# Altium PCB PCB_GW-ERP2U700_2021-09-18.pcbdoc
Units mm, origin at the board's own origin, x right, y up, seen from the top; angles counter-clockwise.
Board outline 149.35 x 127.63 mm, 2 copper layers (Top Layer, Bottom Layer); 26 components, 14 nets, 126 pads, 166 vias.
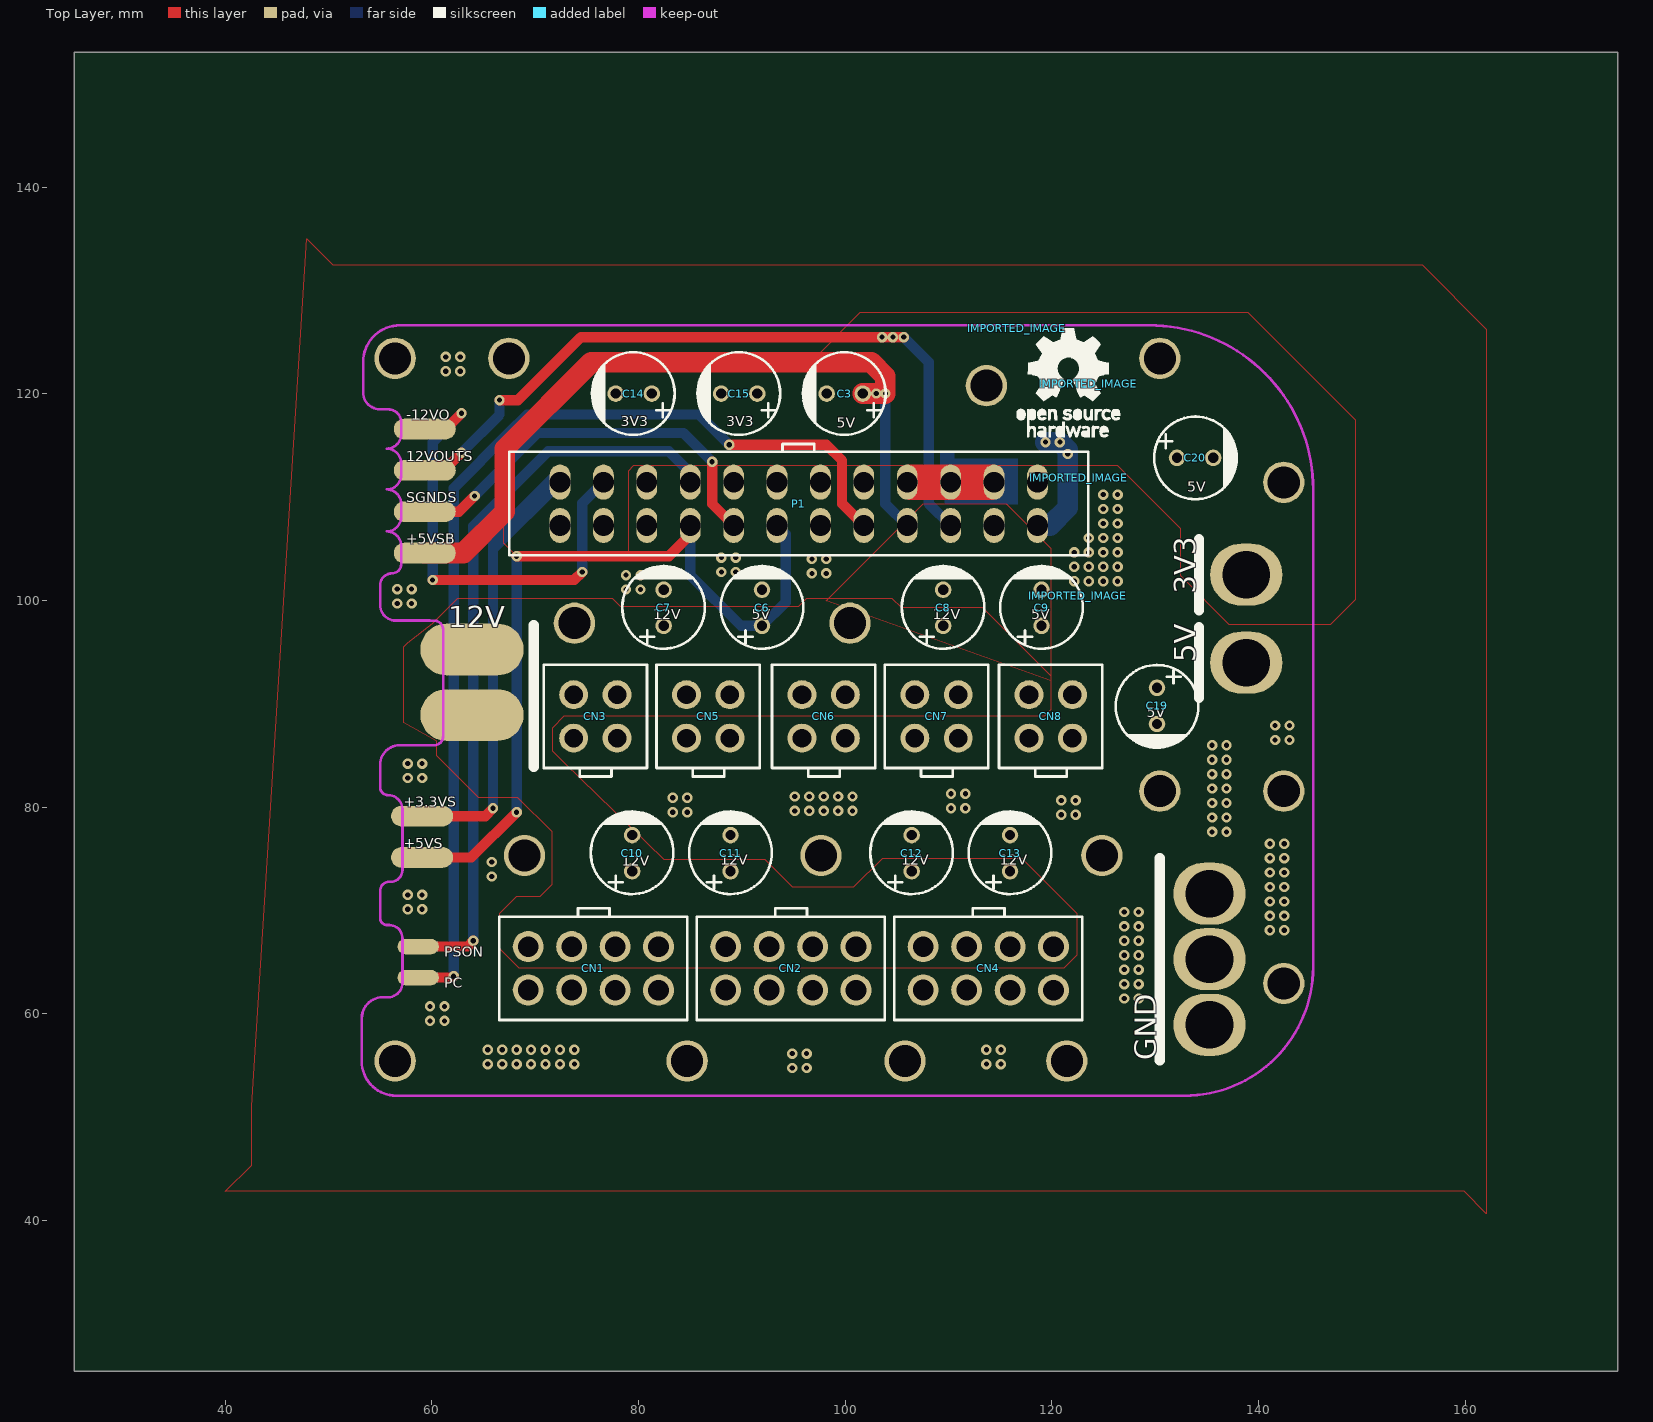
[diagram p0: Top Layer view]
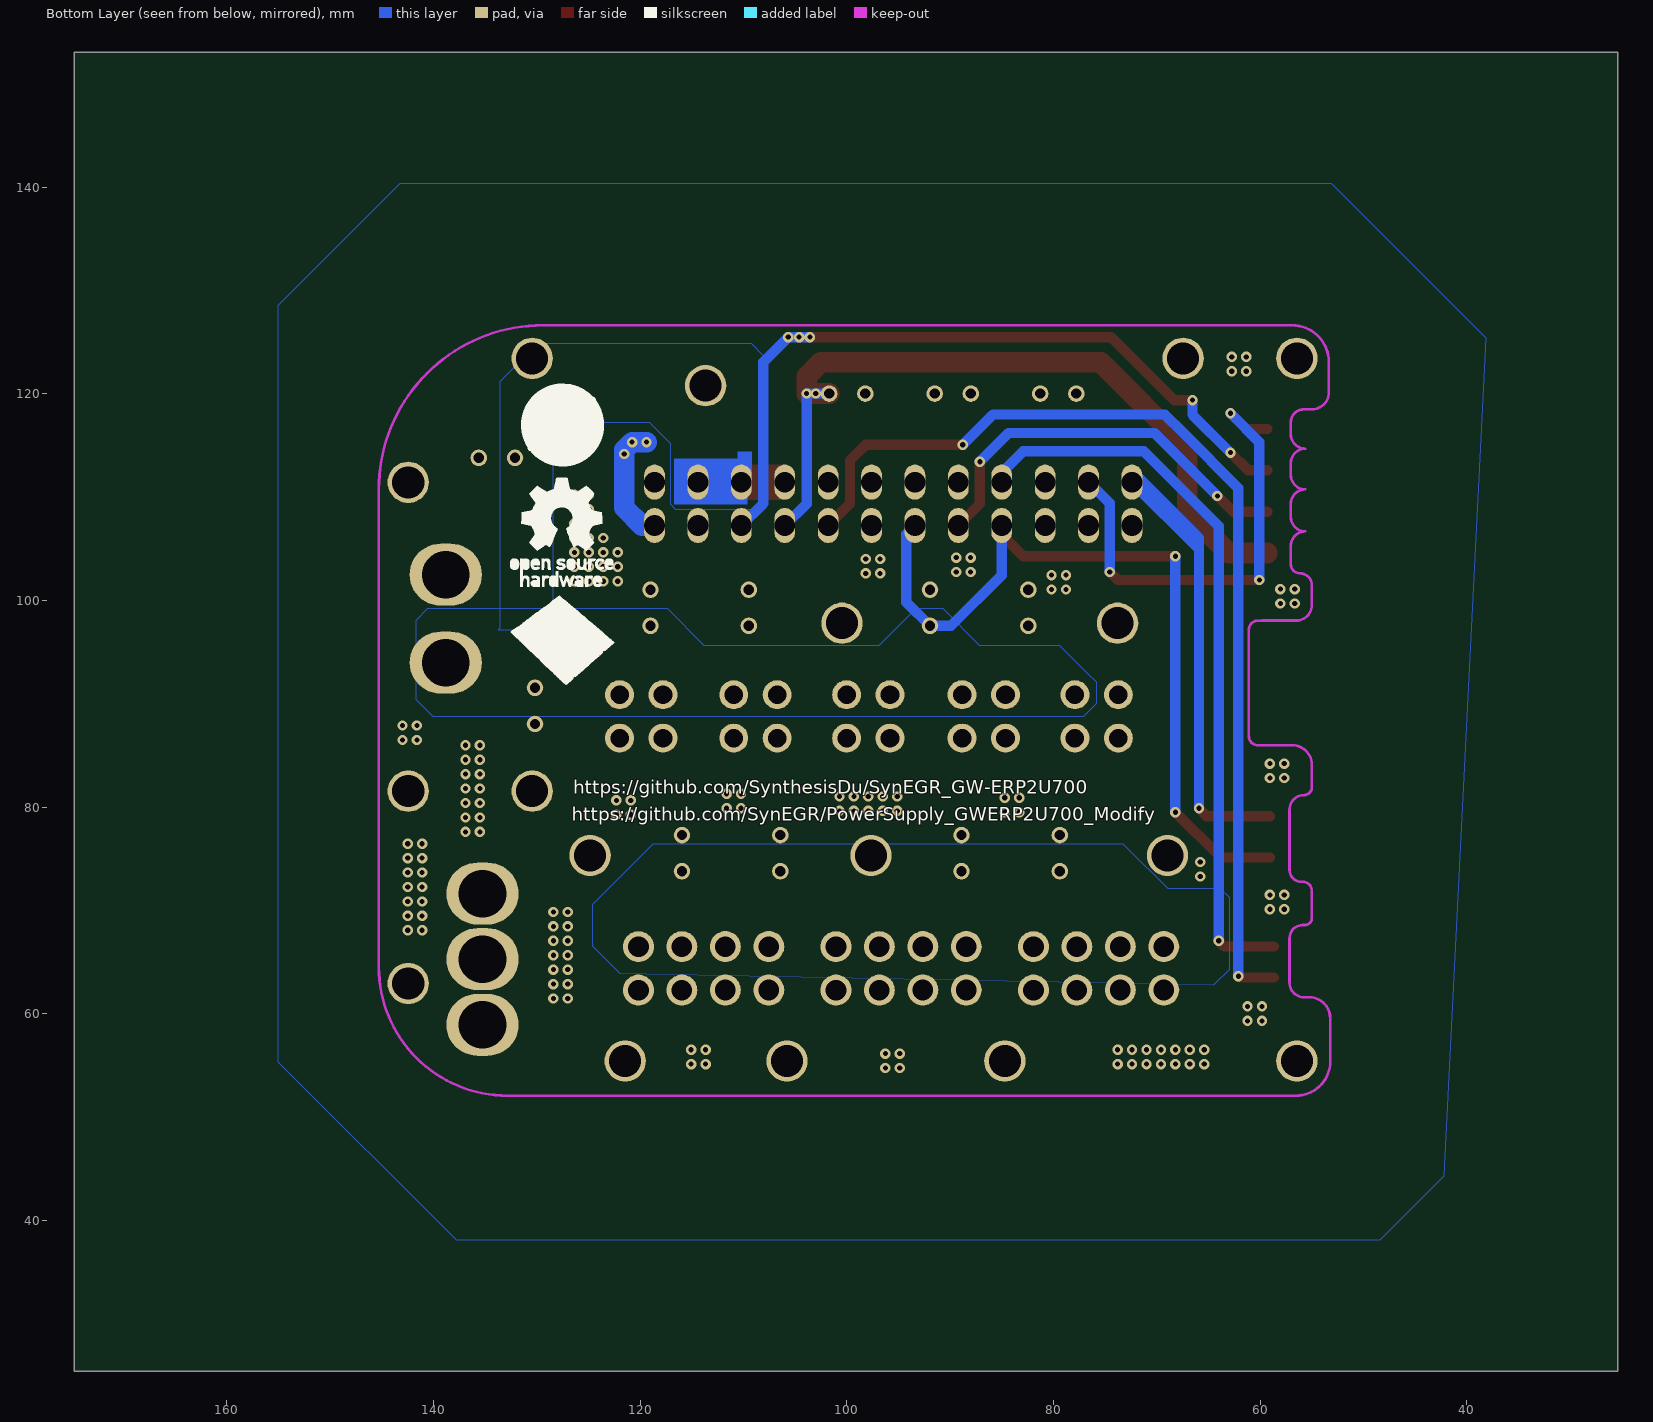
[diagram p1: Bottom Layer view, seen from below]

## Layer stack, top to bottom
Top Layer: signal copper (thickness not stored)
Dielectric: dielectric 0.32, FR-4, Dk 4.8
Bottom Layer: signal copper (thickness not stored)

## Board outline
174.752,25.4 25.4,25.4 25.4,153.035 174.752,153.035

## Components (designator, comment, footprint, x,y, rotation, side; value= is the part's Value field where it differs from the comment)
C3 "CAP-TH_BD8.0-P3.50-D0.6-FD" CAP-TH_BD8.0-P3.50-D0.6-FD 99.949,120.015 r180 top
C6 "CAP-TH_BD8.0-P3.50-D0.6-FD" CAP-TH_BD8.0-P3.50-D0.6-FD 91.948,99.286 r90 top
C7 "CAP-TH_BD8.0-P3.50-D0.6-FD" CAP-TH_BD8.0-P3.50-D0.6-FD 82.423,99.286 r90 top
C8 "CAP-TH_BD8.0-P3.50-D0.6-FD" CAP-TH_BD8.0-P3.50-D0.6-FD 109.474,99.286 r90 top
C9 "CAP-TH_BD8.0-P3.50-D0.6-FD" CAP-TH_BD8.0-P3.50-D0.6-FD 118.999,99.286 r90 top
C10 "CAP-TH_BD8.0-P3.50-D0.6-FD" CAP-TH_BD8.0-P3.50-D0.6-FD 79.375,75.537 r90 top
C11 "CAP-TH_BD8.0-P3.50-D0.6-FD" CAP-TH_BD8.0-P3.50-D0.6-FD 88.9,75.537 r90 top
C12 "CAP-TH_BD8.0-P3.50-D0.6-FD" CAP-TH_BD8.0-P3.50-D0.6-FD 106.426,75.537 r90 top
C13 "CAP-TH_BD8.0-P3.50-D0.6-FD" CAP-TH_BD8.0-P3.50-D0.6-FD 115.951,75.537 r90 top
C14 "CAP-TH_BD8.0-P3.50-D0.6-FD" CAP-TH_BD8.0-P3.50-D0.6-FD 79.53,120.015 r180 top
C15 "CAP-TH_BD8.0-P3.50-D0.6-FD" CAP-TH_BD8.0-P3.50-D0.6-FD 89.739,120.015 r180 top
C19 "CAP-TH_BD8.0-P3.50-D0.6-FD" CAP-TH_BD8.0-P3.50-D0.6-FD 130.175,89.789 r270 top
C20 "CAP-TH_BD8.0-P3.50-D0.6-FD" CAP-TH_BD8.0-P3.50-D0.6-FD 133.858,113.792 r0 top
CN1 "CONN-TH_HAA420A-8A" CONN-TH_HAA420A-8A 75.629,64.389 r0 top
CN2 "CONN-TH_HAA420A-8A" CONN-TH_HAA420A-8A 94.742,64.389 r0 top
CN3 "CONN-TH_HAA420A-4A" CONN-TH_HAA420A-4A 75.819,88.773 r180 top
CN4 "CONN-TH_HAA420A-8A" CONN-TH_HAA420A-8A 113.855,64.389 r0 top
CN5 "CONN-TH_HAA420A-4A" CONN-TH_HAA420A-4A 86.741,88.773 r180 top
CN6 "CONN-TH_HAA420A-4A" CONN-TH_HAA420A-4A 97.917,88.773 r180 top
CN7 "CONN-TH_HAA420A-4A" CONN-TH_HAA420A-4A 108.839,88.773 r180 top
CN8 "CONN-TH_HAA420A-4A" CONN-TH_HAA420A-4A 119.888,88.773 r180 top
IMPORTED_IMAGE "IMPORTED_IMAGE" IMPORTED_IMAGE 122.509,100.449 r0 top
IMPORTED_IMAGE "IMPORTED_IMAGE" IMPORTED_IMAGE 122.579,111.862 r0 top
IMPORTED_IMAGE "IMPORTED_IMAGE" IMPORTED_IMAGE 123.512,120.948 r0 top
IMPORTED_IMAGE "IMPORTED_IMAGE" IMPORTED_IMAGE 116.595,126.34 r0 top
P1 "CONN-TH_4.2-2X12A" CONN-TH_4.2-2X12A 95.504,109.347 r0 top

## Footprints (in the part's own frame and the unit in brackets; to place one, negate y for a bottom-side part, rotate by r counter-clockwise, add the part's x,y. Pads: shape width x height; smd on the part's side, far side on the other; paste and mask are expansions set on the pad)
CAP-TH_BD8.0-P3.50-D0.6-FD [mm]
  round 1.6 hole 1: 1(-1.75,0) 2(1.75,0)
  silkscreen extent -3.96,-4 4.04,4
CONN-TH_4.2-2X12A [mm]
  oval 2x3.4 hole 2: 1(-23.1,-2.1) 2(-23.1,2.1) 3(-18.9,-2.1) 4(-18.9,2.1) 5(-14.7,-2.1) 6(-14.7,2.1) 7(-10.5,-2.1) 8(-10.5,2.1) 9(-6.3,-2.1) 10(-6.3,2.1) 11(-2.1,-2.1) 12(-2.1,2.1) 13(2.1,-2.1) 14(2.1,2.1) 15(6.3,-2.1) 16(6.3,2.1) 17(10.5,-2.1) 18(10.5,2.1) 19(14.7,-2.1) 20(14.7,2.1) 21(18.9,-2.1) 22(18.9,2.1) 23(23.1,-2.1) 24(23.1,2.1)
  silkscreen extent -28.03,-4.99 28.02,5.78
CONN-TH_HAA420A-4A [mm]
  round 2.8 hole 1.8: 1(-2.101,-2.101) 2(-2.101,2.101) 3(2.101,-2.101) 4(2.101,2.101)
  silkscreen extent -5,-5 5,5.82
CONN-TH_HAA420A-8A [mm]
  round 3 hole 2: 1(-6.306,-2.095) 2(-6.306,2.106) 3(-2.104,-2.095) 4(-2.104,2.106) 5(2.104,-2.106) 6(2.104,2.095) 7(6.306,-2.106) 8(6.306,2.095)
  silkscreen extent -9.1,-5 9.1,5.82
IMPORTED_IMAGE [mm]

## Free pads (board coordinates)
  round 4 hole 3.1: 2(56.443,55.427) 2(56.443,123.427) 2(67.443,123.427) 2(68.961,75.311) 2(73.787,97.79) 2(84.709,55.427) 2(97.663,75.311) 2(100.457,97.79) 2(105.791,55.427) 2(113.665,120.777) 2(121.443,55.427) 2(124.841,75.311) 2(130.443,81.534) 2(130.443,123.427) 2(142.443,62.927) 2(142.443,111.427) 2(142.443,81.534)
  oval 4x1.5 smd: 4(58.674,63.5) 4(58.674,66.5)
  oval 6x2 smd: 4(59.055,75.121) 4(59.055,79.121) 4(59.309,104.586) 4(59.309,108.586) 4(59.309,112.586) 4(59.309,116.586)
  oval 10x5 smd: 5(63.881,88.9) 5(63.881,95.25)
  oval 7x6 hole 4.6: 6(135.255,58.928) 6(135.255,65.278) 6(135.255,71.628) 6(138.811,93.98) 6(138.811,102.489)

## Via types
v1: diameter 1, hole 0.5, Top Layer to Bottom Layer, 166 vias

## Nets (pads, with @x,y where several pads share a name; then routed paths per layer and width w, separated by ;. In a path a pad name is that pad's centre, name@x,y a point inside that pad or via, vN(x,y) a via of type N, cw(c..) or ccw(c..) an arc to the next point about the centre after c; other vN are vias at no path point)
+3.3V: C14.1 C15.1 P1.1 P1.2 P1.3 P1.23 pad.6@138.811,102.489 | length 58
  Bottom Layer w1: 65.913,79.883 65.913,106.045 72.136,112.268 72.405,112.268 P1.2 ; 65.913,103.932 65.913,104.956 P1.2
  Bottom Layer w2: P1.23 119.82,107.247 121.539,108.966 v1(121.539,114.173) 121.539,114.554 v1(120.777,115.316) v1(119.38,115.316)
+3.3VS: pad.4@59.055,79.121 | length 7.2
  Top Layer w1: pad.4@59.055,79.121 65.151,79.121 v1(65.913,79.883)
+5V: C6.1 C9.1 C19.1 C20.1 CN3.1 CN5.1 CN6.1 CN7.1 CN8.1 P1.7 P1.11 P1.18 P1.20 P1.22 pad.6@138.811,93.98 | length 24.8
  Bottom Layer w1: P1.7 85.004,102.448 89.916,97.536 C6.1 94.234,99.822 94.234,106.417 P1.11
+5VS: pad.4@59.055,75.121 | length 54.3
  Top Layer w1: pad.4@59.055,75.121 63.818,75.121 v1(68.199,79.502) ; v1(68.199,104.267) 82.931,104.267 85.004,106.34 85.004,107.247
  Bottom Layer w1: v1(68.199,79.502) v1(68.199,104.267)
+5VSB: C3.1 P1.17 pad.4@59.309,104.586 | length 76
  Top Layer w2: pad.4@59.309,104.587 63.058,104.587 67.056,108.585 67.056,114.681 75.438,123.063 102.489,123.063 103.886,121.666 v1(103.886,120.015) v1(102.997,120.015) C3.1
  Bottom Layer w1: C3.1 v1(102.997,120.015) v1(103.886,120.015) 103.886,109.365 P1.17
+12V: C7.1 C8.1 C10.1 C11.1 C12.1 C13.1 CN1.2 CN1.4 CN1.6 CN1.8 CN2.2 CN2.4 CN2.6 CN2.8 CN3.3 CN4.2 CN4.4 CN4.6 CN4.8 CN5.3 CN6.3 CN7.3 CN8.3 P1.19 P1.21 pad.4@59.309,112.586 pad.5 | length 74.7
  Top Layer w1: pad.4@59.309,112.586 61.151,112.586 v1(62.865,114.3) ; v1(66.548,119.38) 68.326,119.38 74.422,125.476 v1(103.576,125.476) v1(104.611,125.476) v1(105.664,125.476)
  Bottom Layer w1: v1(62.865,114.3) 66.548,117.983 v1(66.548,119.38) ; v1(103.576,125.476) v1(105.664,125.476) 108.077,123.063 108.077,109.374 P1.19
-12VO: P1.4 pad.4@59.309,116.586 | length 45.8
  Top Layer w1: pad.4@59.309,116.586 61.341,116.586 v1(62.865,118.11) ; v1(60.071,101.981) 73.787,101.981 v1(74.549,102.743)
  Bottom Layer w1: v1(60.071,101.981) 60.071,115.316 v1(62.865,118.11) ; v1(74.549,102.743) 74.549,109.392 P1.4
NC: P1.16 pad.2
PC: P1.15 pad.4@58.674,63.5 | length 100.3
  Top Layer w1: pad.4@58.674,63.5 61.976,63.5 v1(62.103,63.627) ; v1(88.773,115.062) 98.171,115.062 99.695,113.538 99.695,109.356 P1.15
  Bottom Layer w1: v1(62.103,63.627) 62.103,110.871 67.437,116.205 69.215,117.983 85.852,117.983 v1(88.773,115.062)
PSON: P1.8 pad.4@58.674,66.5 | length 71.5
  Top Layer w1: pad.4@58.674,66.5 63.452,66.5 v1(64.008,67.056)
  Bottom Layer w1: v1(64.008,67.056) 64.008,107.188 71.247,114.427 82.931,114.427 85.004,112.354 P1.8
S$127: 
S$2149: 
SGND: C3.2 C6.2 C7.2 C8.2 C9.2 C10.2 C11.2 C12.2 C13.2 C14.2 C15.2 C19.2 C20.2 CN1.1 CN1.3 CN1.5 CN1.7 CN2.1 CN2.3 CN2.5 CN2.7 CN3.2 CN3.4 CN4.1 CN4.3 CN4.5 CN4.7 CN5.2 CN5.4 CN6.2 CN6.4 CN7.2 CN7.4 CN8.2 CN8.4 P1.5 P1.6 P1.9 P1.10 P1.12 P1.13 P1.14 P1.24 pad.6@135.255,58.928 pad.6@135.255,65.278 pad.6@135.255,71.628
  other v1: 94.869,54.737 96.266,54.737 65.405,55.118 66.802,55.118 68.199,55.118 69.596,55.118 70.993,55.118 72.39,55.118 73.787,55.118 113.665,55.118 115.062,55.118 94.869,56.134 96.266,56.134 65.405,56.515 66.802,56.515 68.199,56.515 69.596,56.515 70.993,56.515 72.39,56.515 73.787,56.515 113.665,56.515 115.062,56.515 59.817,59.309 61.214,59.309 59.817,60.706 61.214,60.706 127,61.468 128.397,61.468 127,62.865 128.397,62.865 127,64.262 128.397,64.262 127,65.659 128.397,65.659 127,67.056 128.397,67.056 141.097,68.072 142.494,68.072 127,68.453 128.397,68.453 141.097,69.469 142.494,69.469 127,69.85 128.397,69.85 57.658,70.104 59.055,70.104 141.097,70.866 142.494,70.866 57.658,71.501 59.055,71.501 141.097,72.263 142.494,72.263 65.786,73.279 141.097,73.66 142.494,73.66 65.786,74.676 141.097,75.057 142.494,75.057 141.097,76.454 142.494,76.454 135.509,77.597 136.906,77.597 135.509,78.994 136.906,78.994 120.904,79.248 122.301,79.248 83.312,79.502 84.709,79.502 95.123,79.629 96.52,79.629 97.917,79.629 99.314,79.629 100.711,79.629 110.236,79.883 111.633,79.883 135.509,80.391 136.906,80.391 120.904,80.645 122.301,80.645 83.312,80.899 84.709,80.899 95.123,81.026 96.52,81.026 97.917,81.026 99.314,81.026 100.711,81.026 110.236,81.28 111.633,81.28 135.509,81.788 136.906,81.788 57.658,82.804 59.055,82.804 135.509,83.185 136.906,83.185 57.658,84.201 59.055,84.201 135.509,84.582 136.906,84.582 135.509,85.979 136.906,85.979 141.605,86.487 143.002,86.487 141.605,87.884 143.002,87.884 56.642,99.695 58.039,99.695 78.788,101.049 80.185,101.049 56.642,101.092 58.039,101.092 122.174,101.854 123.571,101.854 124.968,101.854 126.365,101.854 78.788,102.446 80.185,102.446 96.774,102.616 98.171,102.616 88.011,102.743 89.408,102.743 122.174,103.251 123.571,103.251 124.968,103.251 126.365,103.251 96.774,104.013 98.171,104.013 88.011,104.14 89.408,104.14 122.174,104.648 123.571,104.648 124.968,104.648 126.365,104.648 123.571,106.045 124.968,106.045 126.365,106.045 124.968,107.442 126.365,107.442 124.968,108.839 126.365,108.839 124.968,110.236 126.365,110.236 61.341,122.174 62.738,122.174 61.341,123.571 62.738,123.571
SGNDS: pad.4@59.309,108.586 | length 39.2
  Top Layer w1: pad.4@59.309,108.586 62.612,108.586 v1(64.135,110.109) ; v1(87.122,113.411) 87.122,109.329 89.204,107.247
  Bottom Layer w1: v1(64.135,110.109) 70.231,116.205 84.328,116.205 v1(87.122,113.411)

## Polygon pours and split planes (outlines as drawn)
+12V on Bottom Layer (solid): 121.92,63.881 124.587,66.548 124.587,66.675 124.587,70.612 118.745,76.454 73.279,76.454 72.898,76.073 68.961,72.136 65.659,72.136 63.881,72.136 62.992,71.247 62.992,64.262 64.516,62.738
+12V on Top Layer (solid): 60.071,97.79 62.484,100.203 77.47,100.203 78.232,99.441 95.504,99.441 96.266,100.203 100.33,100.203 104.521,100.203 105.41,99.314 113.284,99.314 119.888,92.71 119.888,89.408 119.253,88.773 72.771,88.773 71.628,87.63 71.628,85.471 72.771,84.328 82.423,74.93 92.202,74.93 94.869,72.263 100.838,72.263 103.632,75.057 117.094,75.057 122.428,69.723 122.428,65.659 121.158,64.389 68.453,64.389 66.548,66.294 66.548,69.723 68.199,71.374 70.485,71.374 71.628,72.517 71.628,77.597 68.326,80.899 64.516,80.899 60.452,84.963 60.452,86.36 57.277,88.138 57.277,95.504 57.658,95.885
+12V on Top Layer (solid): 98.171,99.949 107.569,109.347 110.871,109.347 115.57,109.347 116.586,108.331 119.888,105.029 119.888,92.202
+3.3V on Top Layer (solid): 68.199,104.267 66.929,105.537 66.929,109.855 66.929,114.554 75.438,123.063 96.647,123.063 101.473,127.889 138.938,127.889 149.352,117.475 149.352,100.076 146.939,97.663 137.16,97.663 132.461,102.362 132.461,106.934 130.683,108.712 126.365,113.03 108.712,113.03 79.502,113.03 78.994,112.522 78.994,104.648 78.74,104.394
+5V on Bottom Layer (solid): 77.597,88.773 77.089,88.773 75.819,90.043 75.819,92.075 76.708,92.964 79.375,95.631 82.55,95.631 87.122,95.631 90.678,99.187 93.345,99.187 96.901,95.631 113.792,95.631 117.348,99.187 140.589,99.187 141.732,98.044 141.732,90.424 140.081,88.773
+5V on Bottom Layer (solid): 108.712,108.712 108.077,109.347 108.077,116.84 108.077,123.698 109.22,124.841 129.921,124.841 133.604,121.158 133.604,97.282 133.731,97.155 128.524,97.155 128.397,97.282 128.397,115.062 126.238,117.221 119.126,117.221 117.094,115.189 117.094,109.347 116.586,108.839 109.347,108.839 109.093,108.585
SGND on Top Layer (solid): 47.879,135.001 50.419,132.461 155.829,132.461 162.052,126.238 162.052,40.64 159.893,42.799 40.005,42.799 42.545,45.339 42.545,51.054
SGND on Bottom Layer (solid): 38.1,125.349 53.086,140.335 59.309,140.335 143.256,140.335 155.067,128.524 155.067,55.372 137.795,38.1 48.387,38.1 42.164,44.323

## Keep-outs
Keep-Out Layer:
  lines w0.254 net S$127: 53.213,55.372 ccw(c56.515,55.372) 56.515,52.07 ; 53.213,59.34 cw(c53.221,59.34) 53.221,59.348 ; 53.221,59.571 cw(c55.245,59.571) 55.245,61.595 ; 53.338,120.144 ccw(c54.991,120.144) 54.991,118.491 ; 53.338,120.904 ccw(c53.338,120.906) 53.34,120.906 ; 53.34,123.063 cw(c56.896,123.063) 56.896,126.619 ; 54.991,69.268 ccw(c55.679,69.268) 55.679,68.58 ; 54.991,71.882 cw(c55.88,71.882) 55.88,72.771 ; 54.991,81.915 ccw(c55.753,81.915) 55.753,81.153 cw(c55.753,79.756) 57.15,79.756 ; 54.991,84.084 cw(c56.886,84.084) 56.886,85.979 ; 54.991,99.568 ccw(c56.515,99.568) 56.515,98.044 ; 54.991,101.473 cw(c56.134,101.473) 56.134,102.616 ccw(c56.134,103.505) 57.023,103.505 ; 55.753,61.595 ccw(c55.753,62.992) 57.15,62.992 ; 55.753,118.491 cw(c55.753,117.221) 57.023,117.221 ; 55.88,68.58 cw(c55.88,67.31) 57.15,67.31 ; 56.007,72.771 ccw(c56.007,73.914) 57.15,73.914 ; 57.023,105.283 ccw(c55.626,105.283) 55.626,106.68 ccw(c55.626,108.077) 57.023,108.077 ; 57.023,109.347 ccw(c55.626,109.347) 55.626,110.744 ccw(c55.626,112.141) 57.023,112.141 ; 57.023,113.284 ccw(c55.626,113.284) 55.626,114.681 ccw(c55.626,116.078) 57.023,116.078 ; 59.812,98.049 ccw(c59.817,98.049) 59.817,98.044 ; 60.198,85.979 ccw(c60.198,86.868) 61.087,86.868 ; 60.198,98.044 cw(c60.198,97.155) 61.087,97.155 ; 129.413,126.619 cw(c129.413,110.744) 145.288,110.744 ; 132.842,52.07 ccw(c132.842,64.516) 145.288,64.516

## Other copper
Top Layer:
  rectangle: 106.045,109.728 114.427,113.157
Bottom Layer:
  rectangle net +5V: 109.601,109.283 116.713,113.728
  rectangle net +5V: 109.156,110.617 110.553,114.427

## Silkscreen, mask and mechanical layers (free items; w line width, h text height)
Top Overlay:
  lines w1 net S$2149: 69.85,83.889 69.85,90.747 69.85,97.605 ; 130.429,55.499 130.429,62.357 ; 130.429,61.849 130.429,68.707 ; 130.429,68.199 130.429,75.057 ; 134.239,90.551 134.239,97.409 ; 134.239,99.06 134.239,105.918
  text "-12VO" at 57.531,117.483 h1
  text "3V3" at 78.287,116.848 h1
  text "3V3" at 88.497,116.848 h1
  text "5V" at 99.187,116.721 h1
  text "12VOUTS" at 57.531,113.483 h1
  text "5V" at 133.096,110.498 h1
  text "SGNDS" at 57.531,109.483 h1
  text "+5VSB" at 57.531,105.483 h1
  text "3V3" at 133.858,100.635 h2.03 r90
  text "12V" at 81.407,98.179 h1
  text "5V" at 90.932,98.179 h1
  text "12V" at 108.458,98.179 h1
  text "5V" at 117.983,98.179 h1
  text "12V" at 61.595,97.409 h2.03
  text "5V" at 133.858,94.028 h2.03 r90
  text "5V" at 129.159,88.682 h1
  text "+3.3VS" at 57.277,80.018 h1
  text "+5VS" at 57.277,76.018 h1
  text "12V" at 87.884,74.43 h1
  text "12V" at 105.41,74.43 h1
  text "12V" at 114.935,74.43 h1
  text "12V" at 78.359,74.303 h1
  text "PSON" at 61.214,65.491 h1
  text "PC" at 61.214,62.491 h1
  text "GND" at 130.048,55.499 h2.03 r90
Bottom Overlay:
  text "https://github.com/SynthesisDu/SynEGR_GW-ERP2U700" at 126.492,81.265 h1.3
  text "https://github.com/SynEGR/PowerSupply_GWERP2U700_Modify" at 126.619,78.695 h1.3
Bottom Paste:
  lines w1 net +5V: 85.004,107.247 85.004,102.448 89.916,97.536 91.948,97.536 94.234,99.822 94.234,106.417 93.404,107.247
  lines w1 net +5VSB: 101.699,120.015 102.997,120.015 103.886,120.015 103.886,109.365 106.004,107.247
Bottom Solder:
  lines w1 net +5V: 85.004,107.247 85.004,102.448 89.916,97.536 91.948,97.536 94.234,99.822 94.234,106.417 93.404,107.247
  lines w1 net +5VSB: 101.699,120.015 102.997,120.015 103.886,120.015 103.886,109.365 106.004,107.247